# Altium PCB PCB-Support-STM32F407.PcbDoc (part 2 of 3)
Units mm, origin at the board's own origin, x right, y up, seen from the top; angles counter-clockwise.
Board outline 200 x 110 mm, 4 copper layers (Top Layer, Int1 (GND), Int2 (PWR), Bottom Layer), stack 1.369 mm thick; 116 components, 132 nets, 504 pads, 919 vias.
Unrouted connection lines stored in the file: 2.
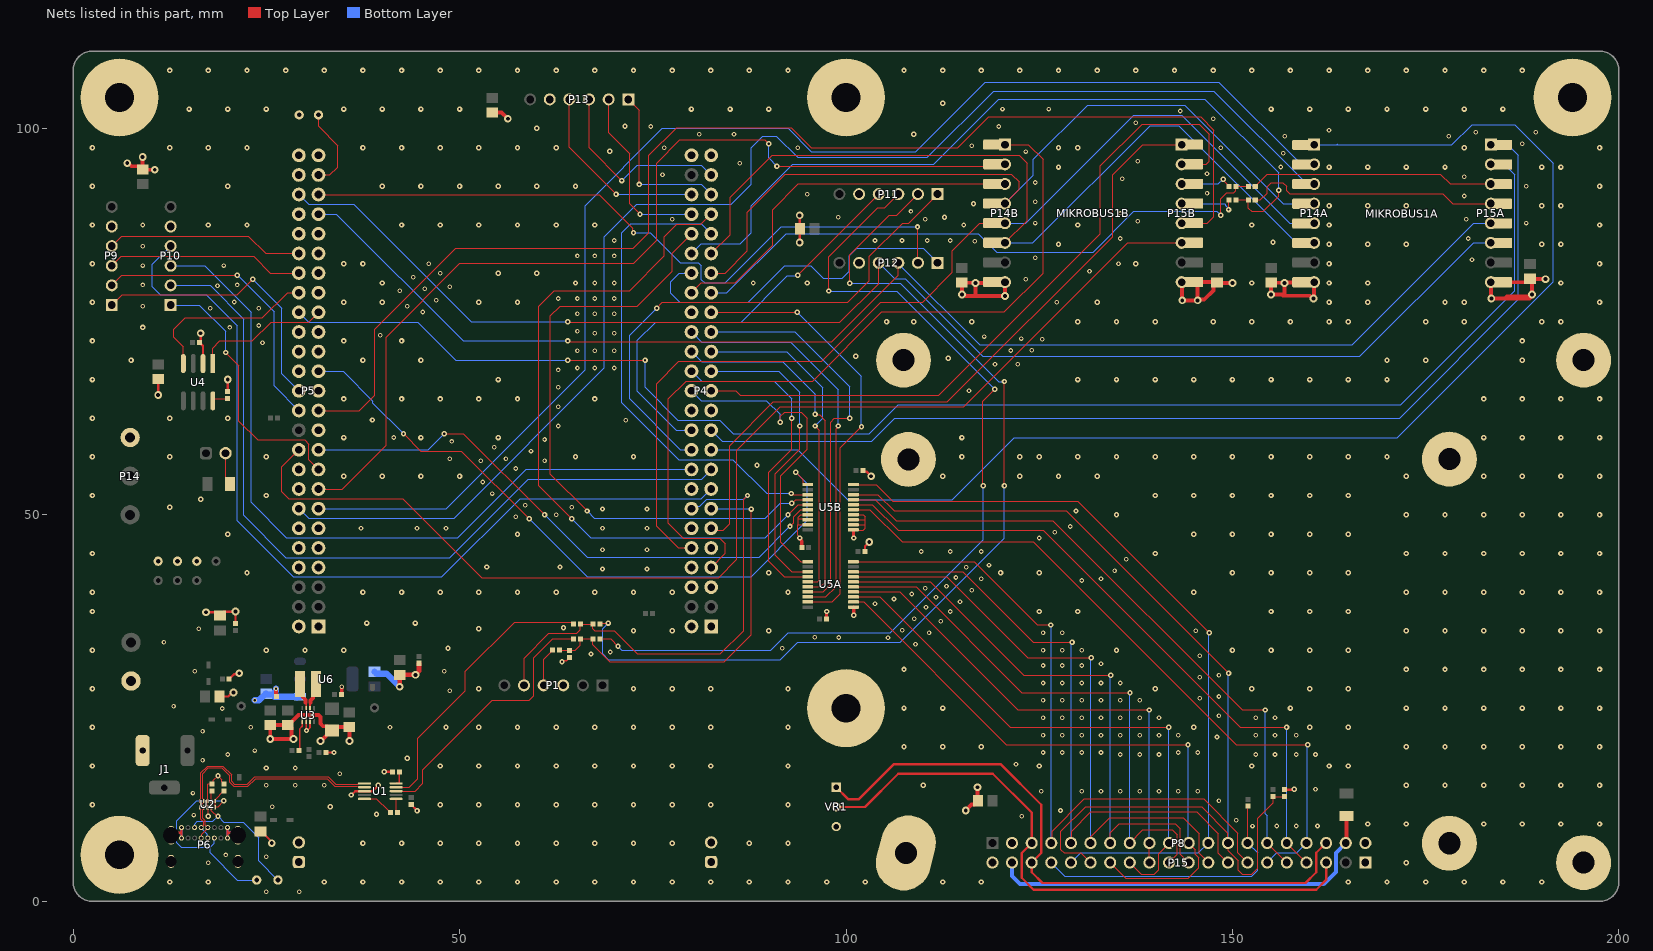
[diagram p4: the nets of this part, all layers, seen from the top]

## Via types
v1: diameter 0.7, hole 0.3, Top Layer to Bottom Layer, tented both sides, 532 vias
v2: diameter 0.6, hole 0.3, Top Layer to Bottom Layer, tented both sides, 298 vias
v3: diameter 1, hole 0.5, Top Layer to Bottom Layer, tented both sides, 89 vias

## Nets (pads, with @x,y where several pads share a name; then routed paths per layer and width w, separated by ;. In a path a pad name is that pad's centre, name@x,y a point inside that pad or via, vN(x,y) a via of type N, cw(c..) or ccw(c..) an arc to the next point about the centre after c; other vN are vias at no path point) (continued)
GND: C1.1 C2.1 C3.1 C4.1 C5.1 C6.1 C7.1 C8.1 C9.1 C10.1 C11.1 C12.1 C13.1 C14.1 C15.1 C16A.1 C16B.1 C17A.1 C17B.1 C18.1 C19.1 C20.1 C21.1 C22.1 C23A.1 C23B.1 C24A.1 C24B.1 C25.1 C26.1 C27.1 GND1.1 GND2.1 GND3.1 GND4.1 J1.2 MH1.1 MH2.1 MH3.1 MH4.1 MH5.1 MH6.1 MH7.1 MH8.1 MH9.1 MH10.1 MH11.1 MIKROBUS1A.8 MIKROBUS1A.9 MIKROBUS1B.8 MIKROBUS1B.9 P1.3 P2.1 P2.2 P3.1 P3.2 P4.1 P4.2 P4.5 P4.23 P4.49 P4.50 P5.1 P5.2 P5.49 P5.50 P6.1 P6.2 P6.3 P6.4 P6.A1 P6.A12 P6.B1 P6.B12 P7.1 P8.2 P8.20 P9.5 P10.5 P11.5 P12.5 P13.5 P14.3 P14A.8 P14B.8 P15.1 P15.20 P15A.8 P15B.8 pad.pt20 R9.1 R13.1 R14.1 R16.1 R19.1 R24.1 U1.3 U2.3 U2.8 U3.6 U3.7 U4.2 U5A.11 U5B.7 U5B.8 U5B.9 U5B.11 U5B.12 U5B.13 U5B.14 U6.1 VR1.3 | length 201.3
  Top Layer w0.15: v1(17.5,11) 17.453,11.047 17.453,12.1 U2.3@17.405,12.148 U2.8@17.405,12.983 17.405,15.112 17.493,15.2 R13.1@18,15.2 18.162,15.362 18.162,15.662 v1(18.75,16.25) 19.25,15.75 19.25,15.45 R14.1@19.5,15.2 ; 93.775,48.725 93.837,48.725 ; 93.775,48.739 93.775,47.363 94,47.138 v1(94,47) ; U5B.9@95.05,48.725 93.837,48.725 ; U5B.8@95.05,49.375 94.962,49.463 93.837,49.463 ; U5B.7@95.05,50.025 94.173,50.025 93.837,49.689 93.837,49.463 ; U5B.11@100.95,48.075 101.025,48 102.25,48 102.5,48.25 102.5,48.75 ; U5B.12@100.95,48.725 102.475,48.725 102.5,48.75 ; U5B.13@100.95,49.375 102.5,49.375 ; U5B.14@100.95,50.025 102.225,50.025 102.5,49.75 102.5,49.375 ; 93.837,48.725 93.837,49.463 ; 102.5,48.75 102.5,49.375
  Top Layer w0.2: 30,24.103 30.15,23.953 U3.6@30.15,23.3 30.15,22.15 v2(30.2,22.1) ; v2@30.2,22.077 v2(30.2,22.1) ; 30.457,24.103 30.65,23.91 U3.7@30.65,23.3 30.65,22.434 30.534,22.318 30.526,22.318 30.308,22.1 v2(30.2,22.1) ; v1(63.25,31) 63.346,31.096 63.796,31.096 R9.1@64.25,31.55
  Top Layer w0.3: v3(11,65.5) C21.1@11,67.55 ; P6.1@12.675,8.545 12.675,8.573 12.952,8.85 14.025,8.85 ; P6.B12@14.025,8.175 14.025,8.85 ; P6.A1@14.025,9.525 14.025,8.85 ; v3(16.5,73.5) 16.5,72.47 C22.1@16.34,72.31 16.805,71.845 U4.2@16.805,69.58 ; v3(17.199,37.402) 18.548,37.402 C14.1@19,36.95 19.5,37.45 20.95,37.45 v3(21,37.5) C15.1@21,35.95 ; C12.1@18.95,26.5 20.061,26.5 20.561,27 v3(20.75,27) ; P6.B1@19.975,8.175 19.975,8.85 ; P6.A12@19.975,9.525 19.975,8.85 ; R19.1@20,65.95 v3(20,67.5) ; C13.1@20.2,28.75 20.816,29.366 21.366,29.366 v3(21.5,29.5) ; P6.2@21.325,8.545 21.325,8.573 21.048,8.85 19.975,8.85 ; C1.1@24.25,9.05 24.35,9.05 25.7,7.7 v3(25.7,7.523) ; R16.1@32.7,19.25 v2(33.75,19.25) ; v1(36,13.75) 36.5,14.25 U1.3@37.7,14.25 38.75,14.25 v1(39.5,15) ; v1(40.25,16.75) C2.1@41.3,16.75 ; C3.1@43.75,12.5 44.5,11.75 v1(44.5,11.7) ; v3(94,85.25) 94,86.95 C19.1@94.05,87 94,87.05 v3(94,88.75) ; C24B.1@102.2,55.75 102.349,55.601 102.649,55.601 v3(103.25,55) ; C24A.1@102.45,45.25 102.45,45.95 v3(103,46.5) ; R24.1@156.75,14.45 157.95,14.45 v1(158,14.5)
  Top Layer w0.4: v1(94,47) 94,46.919 94.277,46.642 C23B.1@94.277,45.79 ; C23A.1@97.45,36.5 97.5,36.55 v1(97.5,37.5) ; U5A.11@100.95,38.075 100.975,38.075 101,38.05 v1(101,37) ; U5B.11@100.95,48.075 100.95,47.05 v1(101,47)
  Top Layer w0.5: v3(7,95.5) 7.135,95.5 7.535,95.1 8.525,95.1 8.967,94.658 v3(10.567,94.658) ; C18.1@9,94.7 v3(9,96.3) ; v2(26.25,27.5) 26.269,27.481 26.269,26.531 C11.1@26.3,26.5 ; v3(32,20.75) 32.05,20.75 33.4,22.1 C4.1@33.5,22.1 ; C6.1@34.75,26.75 v2(34.75,27.75) ; v3(35.75,20.75) C5.1@35.75,22.55 33.95,22.55 C4.1@33.5,22.1 ; C20.1@54.25,102.05 55.45,102.05 v3(56.25,101.25) ; v3(115.5,11.75) 116.25,12.5 116.65,12.5 117.05,12.9 C25.1@117.05,13 117,13.05 v3(117,14.75) ; MIKROBUS1B.9@144.86,80.11 P15B.8@143.43,80.11 143.465,80.075 143.465,77.785 v3(143.5,77.75) v3(145.5,77.75) ; MIKROBUS1B.9@144.86,80.123 C17B.1@148.373,80.123 ; MIKROBUS1B.9@145.5,80.11 v3(145.5,77.75) ; C17B.1@148,80.05 148.05,80 v3(150,80) ; C17B.1@148.018,80.123 147.545,79.65 147.545,79.045 146.346,77.846 145.596,77.846 v3(145.5,77.75) ; C16A.1@155,80.05 v3(155,78.5) 156.393,78.5 156.54,78.354 160.011,78.354 160.365,78 v3(160.5,78) 160.535,78.035 160.535,80.075 P14A.8@160.57,80.11 159.106,80.11 159.041,80.046 156.796,80.046 v3(156.75,80) ; C16A.1@155.11,80 155.135,80.025 156.725,80.025 v3(156.75,80) ; 156.75,78.354 v3(156.75,80) ; v3@188.605,78.148 188.457,78 187,78 ; 188.75,79.9 v3(188.75,78.5) 188.501,78.251 187.251,78.251 ; v3(190.5,80.5) 188.55,80.5 C17A.1@188.5,80.55 188.854,80.196 188.808,80.15 188,80.15 187.942,80.092 MIKROBUS1A.9@184.847,80.092 184.829,80.11 P15A.8@183.43,80.11 183.465,80.075 183.465,78.035 v3(183.5,78) 185.25,78 ; C10.1@27.85,22.8 29.153,24.103 30,24.103 30.457,24.103 31.761,24.103 32,23.864 32,23 32.35,22.65 32.95,22.65 C4.1@33.5,22.1 ; C10.1@27.85,22.8 28.25,22.4 28.25,21.385 28.5,21.135 v3(28.5,21) v3(25.5,21) C9.1@25.5,22.8 C10.1@27.75,22.8 C10.1@27.85,22.8 ; v3(116.75,80) 118.977,80 MIKROBUS1B.8@119.1,80.123 120.557,80.123 P14B.8@120.57,80.11 v3(120.57,78.32) 116.93,78.32 ; v3(116.75,80) 116.725,80.025 115.025,80.025 C16B.1@115,80.05 v3(115,78.5) 115.096,78.404 115.449,78.404 115.534,78.32 116.93,78.32 ; v3(116.75,80) 116.75,78.5 116.93,78.32 ; 185.25,78 187,78 ; 185.25,78 185.501,78.251 187.251,78.251 ; 187,78 187.251,78.251
  Top Layer w0.6: v3(42.25,27.75) C7.1@42.25,29.3 v3(44.3,29.3) 44.75,29.75 C8.1@44.75,30.8
  Bottom Layer w0.3: P6.B12@14.025,8.175 P6.A1@14.025,9.525 ; P6.B1@19.975,8.175 19.975,8.85 ; P6.A12@19.975,9.525 19.975,8.85 ; P6.2@21.325,8.545 21.325,8.573 21.048,8.85 19.975,8.85
  Bottom Layer w0.8: v2(23.5,26) 24.05,26 24.9,26.85 C26.1@25,26.85 25.1,26.75 25.781,26.75 ; v2(26.25,27.5) 26.25,27.219 25.781,26.75 ; U6.1@28.953,26.384 U6.1@29.029,26.46 ; U6.1@29.355,26.46 U6.1@29.029,26.46 ; C27.1@39,29.7 39.25,29.45 40.55,29.45 v3(42.25,27.75) ; 25.781,26.75 26.071,26.46 U6.1@29.029,26.46
  other v1: 12.5,2.5 17.5,2.5 32.5,2.5 37.5,2.5 42.5,2.5 47.5,2.5 52.5,2.5 57.5,2.5 62.5,2.5 67.5,2.5 72.5,2.5 77.5,2.5 82.5,2.5 87.5,2.5 92.5,2.5 97.5,2.5 102.5,2.5 112.5,2.5 117.5,2.5 165,2.5 170,2.5 175,2.5 180,2.5 185,2.5 190,2.5 172.5,5 37.5,7.5 42.5,7.5 47.5,7.5 52.5,7.5 57.5,7.5 62.5,7.5 67.5,7.5 72.5,7.5 77.5,7.5 87.5,7.5 92.5,7.5 167.5,10 172.5,10 182.5,10 187.5,10 192.5,10 197.5,10 39.25,11.25 33.25,12.25 2.5,12.5 47.5,12.5 52.5,12.5 57.5,12.5 62.5,12.5 67.5,12.5 72.5,12.5 77.5,12.5 82.5,12.5 92.5,12.5 110,15 172.5,15 177.5,15 182.5,15 187.5,15 192.5,15 197.5,15 25,17.25 2.5,17.5 47.5,17.5 52.5,17.5 57.5,17.5 62.5,17.5 67.5,17.5 72.5,17.5 77.5,17.5 82.5,17.5 92.5,17.5 125,17.5 152.5,17.5 162.5,17.5 165,17.5 43.25,18.5 107.5,20 112.5,20 117.5,20 172.5,20 177.5,20 182.5,20 187.5,20 192.5,20 197.5,20 2.5,22.5 48.25,22.5 52.5,22.5 57.5,22.5 62.5,22.5 67.5,22.5 72.5,22.5 77.5,22.5 82.5,22.5 92.5,22.5 145,22.5 160,22.5 165,22.5 107.5,25 112.5,25 157.5,25 172.5,25 177.5,25 182.5,25 187.5,25 192.5,25 197.5,25 2.5,27.5 52.5,27.5 72.5,27.5 77.5,27.5 82.5,27.5 92.5,27.5 140,27.5 152.5,27.5 160,27.5 165,27.5 107.5,30 172.5,30 177.5,30 182.5,30 187.5,30 192.5,30 197.5,30 2.5,32.5 25,32.5 30,32.5 35,32.5 135,32.5 150,32.5 155,32.5 160,32.5 165,32.5 48.5,32.75 72.5,35 77.5,35 90,35 172.5,35 177.5,35 182.5,35 187.5,35 192.5,35 197.5,35 52.5,35.25 63.446,35.382 38,36 44.25,36 2.5,37.5 125,37.5 130,37.5 155,37.5 160,37.5 165,37.5 2.5,40 37.5,40 42.5,40 47.5,40 52.5,40 57.5,40 62.5,40 67.5,40 72.5,40 77.5,40 92.5,40 145,40 172.5,40 177.5,40 182.5,40 187.5,40 192.5,40 197.5,40 22.5,42.5 90,42.5 120,42.5 125,42.5 150,42.5 155,42.5 160,42.5 165,42.5 53.5,43.25 63,43.25 2.5,45 140,45 172.5,45 177.5,45 182.5,45 187.5,45 192.5,45 197.5,45 20,47.5 57.5,47.5 145,47.5 150,47.5 155,47.5 160,47.5 165,47.5 135,50 172.5,50 177.5,50 182.5,50 187.5,50 192.5,50 197.5,50 12.5,51 16.5,52 2.5,52.5 25,52.5 140,52.5 145,52.5 150,52.5 155,52.5 160,52.5 165,52.5 35,55 40,55 45,55 50,55 112.5,55 122.5,55 127.5,55 132.5,55 172.5,55 182.5,55 187.5,55 192.5,55 197.5,55 88.49,56.428 2.5,57.5 12.5,57.5 25,57.5 65,57.5 72.5,57.5 115,57.5 122.5,57.5 125,57.5 130,57.5 135,57.5 140,57.5 145,57.5 150,57.5 155,57.5 160,57.5 165,57.5 170,57.5 35,60 45,60 55,60 115,60 182.5,60 187.5,60 192.5,60 197.5,60 38.727,62.271 2.5,62.5 12.5,62.5 20,62.5 35,65 42.5,65 47.5,65 52.5,65 57.5,65 67.5,65 182.5,65 187.5,65 192.5,65 197.5,65 2.5,67.5 55,67.5 130,67.5 135,67.5 140,67.5 145,67.5 150,67.5 155,67.5 160,67.5 165,67.5 170,67.5 7.5,70 37.5,70 45,70 170,70 175,70 187.5,70 113.25,70.25 101.25,70.5 2.5,72.5 35,72.5 42.5,72.5 187.5,72.5 9,74.25 105.25,75 108.75,75 116.25,75 130,75 135,75 140,75 147.5,75 152.5,75 157.5,75 162.5,75 165,75 175,75 180,75 190,75 192.5,75 2.5,77.5 35,77.5 40,77.5 52.5,77.5 57.5,77.5 132.5,77.5 162.5,77.5 167.5,77.5 177.5,77.5 180,77.5 197.5,77.5 40,80 65,80 95,80 152.5,80 162.5,80 167.5,80 192.5,80 55,81.25 60,81.25 2.5,82.5 35,82.5 37.5,82.5 137.5,82.5 162.5,82.5 197.5,82.5 127.5,85 162.5,85 167.5,85 172.5,85 190,85 192.5,85 155.25,85.25 2.5,87.5 17.5,87.5 22.5,87.5 42.5,87.5 47.5,87.5 52.5,87.5 57.5,87.5 62.5,87.5 67.5,87.5 130,87.5 152.5,87.5 162.5,87.5 197.5,87.5 112.75,88.5 162.5,90 167.5,90 172.5,90 190,90 192.5,90 116.5,90.25 2.5,92.5 20,92.5 40,92.5 45,92.5 50,92.5 55,92.5 60,92.5 65,92.5 197.5,92.5 127.5,95 162.5,95 167.5,95 172.5,95 177.5,95 190,95 192.5,95 69.421,97.024 2.5,97.5 12.5,97.5 17.5,97.5 22.5,97.5 37.5,97.5 42.5,97.5 47.5,97.5 52.5,97.5 57.5,97.5 62.5,97.5 127.5,97.5 130,97.5 180,97.5 197.5,97.5 108.75,99.25 60,100 71.409,100.296 15,102.5 20,102.5 25,102.5 35,102.5 40,102.5 45,102.5 50,102.5 80,102.5 85,102.5 90,102.5 155,102.5 160,102.5 165,102.5 170,102.5 175,102.5 180,102.5 185,102.5 112.5,103.25 12.5,107.5 17.5,107.5 22.5,107.5 27.5,107.5 32.5,107.5 37.5,107.5 42.5,107.5 47.5,107.5 52.5,107.5 57.5,107.5 62.5,107.5 67.5,107.5 72.5,107.5 77.5,107.5 82.5,107.5 87.5,107.5 92.5,107.5 107.5,107.5 112.5,107.5 117.5,107.5 122.5,107.5 127.5,107.5 132.5,107.5 137.5,107.5 142.5,107.5 147.5,107.5 152.5,107.5 157.5,107.5 162.5,107.5 167.5,107.5 172.5,107.5 177.5,107.5 182.5,107.5 187.5,107.5
  other v2: 25,1.25 29.25,1.25 17.5,5 25,5.75 19.75,6 152.603,9.732 155.75,9.75 158.25,9.75 161,9.75 150.5,10.5 122.75,11 15.612,11.154 127.75,11.75 25.75,12.25 148.25,13 15.5,14 125.25,14.25 130.5,14.25 133,14.25 135.5,14.25 138,14.25 140.5,14.25 143,14.25 145.5,14.25 160.75,14.5 25,15 28.75,15 32.5,15 34.5,16.5 28.75,17.25 122,17.75 16.75,18.25 20,19 135.5,19 138,19 140.5,19 153,19 155.5,19 158.25,19 160.75,19 125.5,19.25 128,19.25 130.5,19.25 133,19.25 143,19.25 145.5,19.25 23.5,19.5 148,21.25 125.5,21.5 128,21.5 130.5,21.5 133,21.5 135.5,21.5 138,21.5 140.5,21.5 143,21.5 153,21.5 155.5,21.5 158.25,21.5 16.75,22 23,22.5 41,22.5 125.5,23.75 128,23.75 130.5,23.75 133,23.75 135.5,23.75 138,23.75 140.5,23.75 153,23.75 155.5,23.75 148.25,24 19.297,24.947 13,25.25 125.5,26 128,26 130.5,26 133,26 135.5,26 138,26 145.75,26.25 148.25,26.5 48.75,27.25 125.5,28.25 128,28.25 130.5,28.25 133,28.25 135.5,28.25 145.75,29 148.25,29.25 15.75,29.75 48,29.75 125.5,30.5 128,30.5 130.5,30.5 133,30.75 145.75,31.75 67,32 69.5,32.25 125.5,32.5 128,32.5 130.5,32.5 91.75,32.75 109,33.25 11.75,33.5 99.068,34.125 105.443,34.107 95.963,34.153 110.75,34.75 125.5,34.75 128,34.75 145.25,35 107.276,35.065 16.25,35.25 112.25,36.25 108.814,36.566 113.5,37.5 110.353,38.031 103.75,38.5 114.75,38.75 106.218,39.108 111.642,39.358 108.5,39.75 116.25,40.25 110.25,40.5 113,40.75 130.5,41.5 117.5,41.75 133,41.75 114.222,41.891 134.75,42.75 68.5,43 74.25,43 115.567,43.208 118.5,43.5 136.25,44.25 109.75,45.25 113.5,45.25 117.5,45.25 68.5,45.5 74.25,45.5 125,47 127,47.75 37.25,48.25 44.5,48.25 48.25,48.25 68.5,48.25 74.25,48.25 129,48.5 57.25,49.75 62.5,50 129.75,50.5 68.5,50.75 74.25,50.75 64.5,51 58.5,51.25 54.25,52.75 53,54.25 57.25,56 52.75,57 61,57 48.75,57.25 56,57.25 59.25,58.25 54.5,58.75 49,59.5 61,59.75 41.5,60 62.75,61.5 71.5,62.25 62.75,64 115.915,66.07 62.75,66.5 62.75,68.75 65.25,69 67.5,69 70,69 119.283,69.473 122.237,69.472 65.25,71.25 67.5,71.25 70,71.25 121.301,71.268 124.047,71.28 24.5,72.25 125.408,72.735 122.686,72.806 117.875,73.064 39.75,73.25 67.5,73.5 70,73.5 65.25,73.75 20.25,74.25 24,74.5 65.25,76 67.5,76 70,76 45.25,76.25 17.75,76.75 24,76.75 9,77 43.25,77 127.25,77.5 20.837,77.537 47,77.75 62.75,78 65.25,78 67.5,78 70,78 42.25,79 45.5,79.25 48.75,79.5 18.68,79.64 9,79.75 21.25,79.75 67.5,80 70,80 88,80 123.25,80.5 44,80.75 47.5,81.25 131.5,81.5 9,82.25 19.5,82.25 46,82.5 135.25,82.5 181,83 124.5,83.25 65.25,83.5 67.5,83.5 70,83.5 9,84.75 116.656,85.403 70,85.5 103.75,85.5 107.25,85.5 110.5,85.5 113.5,85.5 135.5,85.75 180.5,85.75 9,87.5 115.25,87.5 124.5,87.75 188,87.75 137.75,88 77.5,88.25 110.25,88.25 180.25,88.25 99,88.5 135.5,89 108.401,89.258 124.5,90.5 180,91.25 95,91.5 146.718,91.6 188,92.5 124.5,93 135.75,93.5 180,93.75 76.25,94 146.708,94.146 156.25,95 86.25,95.5 137.75,95.75 156.557,96.782 123.25,97 76.5,97.5 93.75,97.5 148.5,97.5 116.25,97.75 187.5,98 156.75,99 178,99 81,99.25 85.5,99.25 181.5,99.5 189.25,99.5 162.5,99.75 74.75,100.25 119.75,100.25 137.501,100.747 147.5,101.25 143.25,102.25 120.25,102.5 126.25,102.5
MB1-RX: MIKROBUS1A.14 P15A.3 R3.1 | length 31.7
  Top Layer w0.15: R3.1@152.936,92.536 152.986,92.536 153.2,92.75 153.2,92.8 154.488,94.088 176.912,94.088 178.19,92.81 P15A.3@183.43,92.81
MB1-TX: MIKROBUS1A.13 P15A.4 R4.1 | length 33.4
  Top Layer w0.15: R4.1@152.95,90.75 153.628,90.75 154.474,91.596 154.474,92.474 155,93 156.5,93 157,92.5 157,91.948 157.395,91.553 177.205,91.553 178.488,90.27 P15A.4@183.43,90.27
MB2-RX: MIKROBUS1B.14 P15B.3 R1.1 | length 6.9
  Top Layer w0.15: v1(148.811,93.433) 148.916,93.327 148.916,93.134 149.3,92.75 R1.1@149.55,92.5
  Bottom Layer w0.15: P15B.3@143.43,92.81 148.161,92.81 148.784,93.433 v1(148.811,93.433)
MB2-TX: MIKROBUS1B.13 P15B.4 R2.1 | length 7.8
  Top Layer w0.15: v1(149.5,89.5) 149.5,90.7 R2.1@149.55,90.75
  Bottom Layer w0.15: P15B.4@143.43,90.27 148.98,90.27 149.165,90.085 149.165,89.979 149.5,89.644 v1(149.5,89.5)
NetC2_2: C2.2 U1.10 | length 1.9
  Top Layer w0.2: U1.10@41.8,15.25 42.2,15.25 C2.2@42.2,16.75
NetCC1_1: CC1.1 P6.A5 R13.2 U2.4 U2.7 | length 20.6
  Top Layer w0.15: R13.2@18,14.3 17.905,14.205 U2.7@17.905,12.983 17.905,11.718 18.623,11 v1(18.75,11)
  Bottom Layer w0.15: P6.A5@15.725,9.525 15.725,9.999 16.066,10.34 18.09,10.34 v1(18.75,11) 19.516,10.234 22.016,10.234 24,8.25 24,5.25 CC1.1@26.5,2.75
NetCC2_1: CC2.1 P6.B5 R14.2 U2.5 U2.6 | length 28.2
  Top Layer w0.15: U2.5@18.405,12.148 U2.5@18.405,12.225 ; v1(19.5,13) 18.75,12.25 18.43,12.25 U2.5@18.405,12.225 ; R14.2@19.5,14.3 18.43,13.23 18.43,13.008 U2.6@18.405,12.983 U2.5@18.405,12.225
  Bottom Layer w0.15: P6.B5@18.275,8.175 18.275,7.525 17.75,7 ; v1(19.5,13) 16,13 13.401,10.4 13.401,7.599 14,7 17.75,7 ; CC2.1@23.75,2.75 21.25,2.75 17.75,6.25 17.75,7
NetJ2_2: J2.2 R20.2 | length 4.2
  Top Layer w0.125: J2.2@19.725,57.975 19.725,54.525 R20.2@20.275,53.975
NetL1_1: L1.1 U3.3 | length 3.5
  Top Layer w0.2: 30.079,25.724 30.15,25.652 U3.3@30.15,24.9 U3.3@30.142,24.908
  Top Layer w0.5: L1.1@29.35,28.1 29.75,27.7 29.75,26.406 30.079,26.078 30.079,25.724
NetL1_2: L1.2 U3.2 | length 3.5
  Top Layer w0.2: U3.2@30.65,24.9 30.65,25.659 30.729,25.738
  Top Layer w0.5: 30.729,25.738 30.729,25.979 31.05,26.3 31.05,27.7 L1.2@31.45,28.1
NetP1_4: P1.4 R7.2 | length 5
  Top Layer w0.15: P1.4@60.88,27.94 60.88,31.33 R7.2@62.05,32.5
NetP4_6: P4.6
NetP4_8: P4.8
NetP4_9: P4.9
NetP4_12: P4.12
NetP4_16: P4.16
NetP4_24: P4.24
NetP4_34: P4.34
NetP5_7: P5.7
NetP5_8: P5.8
NetP5_9: P5.9
NetP5_10: P5.10
NetP5_11: P5.11
NetP5_12: P5.12
NetP5_16: P5.16
NetP5_18: P5.18
NetP5_21: P5.21
NetP5_25: P5.25
NetP5_28: P5.28
NetP5_29: P5.29
NetP5_30: P5.30
NetP5_31: P5.31
NetP5_32: P5.32
NetP5_35: P5.35
NetP5_37: P5.37
NetP5_39: P5.39
NetP5_41: P5.41
NetP5_42: P5.42
NetP5_44: P5.44
NetP5_48: P5.48
NetP8_3: P8.3 P15.3 VR1.2 | length 80.9
  Top Layer w0.3: VR1.2@98.75,12.21 102.46,12.21 106.75,16.5 119,16.5 124.021,11.479 P8.3@124.021,7.539 122.734,6.252 122.734,3.04 124.274,1.5 160.857,1.5 162.121,2.764 P15.3@162.121,5.009
NetP8_4: P8.4 P15.7 U5A.20 | length 90.7
  Top Layer w0.15: U5A.20@100.95,43.925 116.575,43.925 124.75,35.75 v1(126.5,35.75) ; P8.4@126.561,7.539 126.691,7.669 126.691,9.084 130.857,13.25 146.274,13.25 150.691,8.834 150.691,6.279 P15.7@151.961,5.009
  Bottom Layer w0.15: v1(126.5,35.75) 126.53,35.72 126.53,7.569 P8.4@126.561,7.539
NetP8_5: P8.5 P15.8 U5A.18 | length 85.1
  Top Layer w0.15: U5A.18@100.95,42.625 115.125,42.625 124.25,33.5 v1(129.25,33.5) ; P8.5@129.101,7.539 129.191,7.629 129.191,9.084 131.691,11.584 145.354,11.584 148.191,8.747 148.191,6.239 P15.8@149.421,5.009
  Bottom Layer w0.15: P8.5@129.101,7.539 129.175,7.613 129.175,33.425 v1(129.25,33.5)
NetP8_6: P8.6 P15.9 U5A.17 | length 80
  Top Layer w0.15: U5A.17@100.95,41.975 113.025,41.975 123.5,31.5 v1(131.75,31.5) ; P8.6@131.641,7.539 131.691,7.589 131.691,8.334 134.154,10.797 143.613,10.797 145.691,8.719 145.691,6.199 P15.9@146.881,5.009
  Bottom Layer w0.15: P8.6@131.641,7.539 131.695,7.593 131.695,31.445 v1(131.75,31.5)
NetP8_7: P8.7 P15.10 U5A.16 | length 76.1
  Top Layer w0.15: U5A.16@100.95,41.325 110.92,41.325 122.995,29.25 v1(134.25,29.25) ; P8.7@134.181,7.539 134.181,8.874 135.371,10.064 142.576,10.064 143.269,9.371 143.269,6.08 P15.10@144.341,5.009
  Bottom Layer w0.15: P8.7@134.181,7.539 134.215,7.573 134.215,29.215 v1(134.25,29.25)
NetP8_8: P8.8 P15.11 U5A.15 | length 72.1
  Top Layer w0.15: U5A.15@100.95,40.675 109.07,40.675 122.745,27 v1(136.75,27) ; P8.8@136.721,7.539 138.412,9.23 142.218,9.23 142.868,8.58 142.868,6.077 P15.11@141.801,5.009
  Bottom Layer w0.15: P8.8@136.721,7.539 136.735,7.553 136.735,26.985 v1(136.75,27)
NetP8_9: P8.9 P15.12 U5A.14 | length 64.4
  Top Layer w0.15: U5A.14@100.95,40.025 106.975,40.025 122.25,24.75 v1(139.25,24.75) ; P15.12@139.261,5.009 P8.9@139.261,7.539
  Bottom Layer w0.15: v1(139.25,24.75) 139.255,24.745 139.255,7.544 P8.9@139.261,7.539
NetP8_10: P8.10 P15.13 U5A.13 | length 71.4
  Top Layer w0.15: U5A.13@100.95,39.375 104.375,39.375 121.25,22.5 v1(141.75,22.5) ; P15.13@136.721,5.009 138.217,3.512 139.869,3.512 140.441,4.084 140.441,6.179 P8.10@141.801,7.539
  Bottom Layer w0.15: v1(141.75,22.5) 141.775,22.475 141.775,7.564 P8.10@141.801,7.539
NetP8_11: P8.11 P15.14 U5A.12 | length 80.3
  Top Layer w0.15: U5A.12@100.95,38.725 102.275,38.725 120.75,20.25 v1(144.25,20.25) ; P15.14@134.181,5.009 136.195,2.994 144.297,2.994 145.628,4.326 145.628,5.646 145.191,6.084 145.191,6.689 P8.11@144.341,7.539
  Bottom Layer w0.15: v1(144.25,20.25) 144.295,20.205 144.295,7.584 P8.11@144.341,7.539
NetP8_12: P8.12 P15.16 U5B.20 | length 100.1
  Top Layer w0.15: U5B.20@100.95,53.925 103.886,53.925 106.061,51.75 130,51.75 v1(147,34.75)
  Bottom Layer w0.15: P15.16@129.101,5.009 130.342,6.25 145.592,6.25 146.94,7.598 146.94,34.69 v1(147,34.75)
NetP8_13: P8.13 P15.15 R23.1 R24.2 U5B.18 | length 131.5
  Top Layer w0.15: U5B.18@100.95,52.625 104.125,52.625 106.25,50.5 128.5,50.5 v1(149.5,29.5) ; P15.15@131.641,5.009 130.399,6.25 128.25,6.25 127.803,6.697 127.803,9.053 131,12.25 146,12.25 149.421,8.829 P8.13@149.421,7.539 149.471,7.488 149.471,6.529 150.75,5.25 150.75,4 151.25,3.5 152.5,3.5 153.25,4.25 153.25,10.75 155.25,12.75 R23.1@155.25,13.55 ; R23.1@155.3,13.6 R23.1@155.25,13.55 ; R24.2@156.75,13.55 R23.1@155.25,13.55
  Bottom Layer w0.15: P8.13@149.421,7.539 149.46,7.578 149.46,29.46 v1(149.5,29.5)
NetP8_14: P8.14 P15.17 R21.1 | length 36.3
  Top Layer w0.15: P8.14@151.961,7.539 151.961,11.961 R21.1@152,12
  Bottom Layer w0.15: P15.17@126.561,5.009 128.319,3.25 152.5,3.25 153.25,4 153.25,6.249 P8.14@151.961,7.539
NetP8_15: P8.15 P15.5 U5B.17 | length 85.5
  Top Layer w0.15: U5B.17@100.95,51.975 103.775,51.975 106.5,49.25 126.75,49.25 151.25,24.75 v1(154.25,24.75) ; P8.15@154.501,7.539 154.506,7.539 157.036,5.009 P15.5@157.041,5.009
  Bottom Layer w0.15: v1(154.25,24.75) 154.25,11.304 154.5,11.054 P8.15@154.501,7.539
NetP8_16: P8.16 P15.4 U5B.16 | length 86.6
  Top Layer w0.15: U5B.16@100.95,51.325 103.425,51.325 106.75,48 125.5,48 151,22.5 v1(157,22.5) ; P8.16@157.041,7.539 157.046,7.539 159.576,5.009 P15.4@159.581,5.009
  Bottom Layer w0.15: v1(157,22.5) 157.02,22.48 157.02,7.559 P8.16@157.041,7.539
NetP8_17: P8.17 P15.6 U5B.15 | length 90.3
  Top Layer w0.15: U5B.15@100.95,50.675 103.075,50.675 107.25,46.5 124.25,46.5 150.5,20.25 v1(159.75,20.25)
  Bottom Layer w0.15: P15.6@154.501,5.009 155.742,6.25 158.292,6.25 159.665,7.623 159.665,20.165 v1(159.75,20.25)
NetP8_18: P8.18 P15.18 VR1.1 | length 82.7
  Top Layer w0.3: VR1.1@98.74,14.75 100.269,13.221 101.676,13.221 106.205,17.75 120,17.75 125.25,12.5 125.25,6.238 P15.18@124.021,5.009 124.021,3.754 125.411,2.364 159.471,2.364 160.851,3.744 160.851,6.269 P8.18@162.121,7.539
NetP8_19: P8.19 P15.19 R22.2 | length 52.5
  Top Layer w0.5: P8.19@164.661,7.539 164.75,7.628 R22.2@164.75,11.05
  Bottom Layer w0.5: P15.19@121.481,5.009 121.481,3.269 122.5,2.25 161.822,2.25 163.384,3.812 163.384,6.262 P8.19@164.661,7.539
NetR15_1: R15.1 U1.5 | length 4.3
  Top Layer w0.15: U1.5@37.7,13.25 39.252,13.25 40.753,11.75 40.8,11.75 R15.1@41.05,11.5 R15.1@41.05,11.24
NetR15_2: R15.2 U1.6 | length 1.8
  Top Layer w0.15: U1.6@41.8,13.25 41.8,11.65 R15.2@41.95,11.5
NetR18_1: R18.1 U3.5 | length 4
  Top Layer w0.2: R18.1@29.2,19.5 29.35,19.65 29.35,22.35 29.65,22.65 U3.5@29.65,23.3
NetR19_2: R19.2 U4.8 | length 2.1
  Top Layer w0.15: U4.8@18.075,64.752 18.075,64.832 18.293,65.05 R19.2@20,65.05
PA1/TIM-2/5: MIKROBUS1B.16 P4.11 P15B.1 | length 92.3
  Top Layer w0.15: P4.11@82.55,48.26 82.81,48 84.115,48 84.958,48.843 84.958,58.958 90.604,64.604 113.104,64.604 134.5,86 134.5,94 138.39,97.89 P15B.1@143.43,97.89
PA2/USART2-TX: P1.5 P4.14 R5.2 R8.2 | length 63
  Top Layer w0.15: P1.5@58.34,27.94 58.34,31.464 61.549,34.672 65.145,34.672 65.62,35.147 R8.2@65.62,35.865 R5.2@67.26,35.865 67.26,35.24 67.5,35 70,35 73,32 83.75,32 86.75,35 86.75,52 v1(87.25,52.5)
  Bottom Layer w0.15: P4.14@80.01,50.8 80.322,51.112 81.095,51.112 81.983,52 86.75,52 v1(87.25,52.5)
PA3/USART2-RX: P4.13 R6.2 R7.1 R9.2 R10.2 | length 50.5
  Top Layer w0.15: R7.1@62.95,32.5 64.974,32.5 65.62,33.146 R10.2@65.62,33.96 R6.2@67.26,33.96 67.26,33.205 69.465,31 84.25,31 87.75,34.5 v1(87.75,50.75)
  Bottom Layer w0.15: P4.13@82.55,50.8 82.575,50.775 87.725,50.775 v1(87.75,50.75)
PA5/SPI1-CLK: P4.15 P10.4 | length 113.6
  Bottom Layer w0.15: P10.4@12.62,84.77 10.25,82.4 10.25,79.5 11.301,78.449 17.207,78.449 21.218,74.437 21.218,49.236 28.496,41.959 47.709,41.959 57.825,52.075 81.285,52.075 P4.15@82.55,53.34
PA6/SPI1-MISO: P4.18 P10.3 | length 100.1
  Bottom Layer w0.15: P10.3@12.62,82.23 17.02,82.23 23.021,76.229 23.021,51.6 27.598,47.023 49.773,47.023 58.63,55.88 P4.18@80.01,55.88
PA7/SPI1-MOSI: P4.17 P10.2 | length 104.1
  Bottom Layer w0.15: P10.2@12.62,79.69 17.724,79.69 22.086,75.329 22.086,49.922 27.544,44.464 48.714,44.464 58.884,54.634 81.304,54.634 P4.17@82.55,55.88
PA8/I2C3-SCL: MIKROBUS1A.12 P5.43 P12.3 P15A.5 | length 174.6
  Top Layer w0.15: v1(64,72.5) 64.078,72.422 98.167,72.422 106.77,81.025 P12.3@106.77,82.61
  Bottom Layer w0.15: P5.43@31.75,88.9 34.068,88.9 50.468,72.5 v1(64,72.5) ; P12.3@106.77,82.61 106.77,82.516 117.286,72 165.5,72 181.23,87.73 P15A.5@183.43,87.73
PA15/D3: P5.40 P9.4 | length 25.7
  Top Layer w0.15: P9.4@5,84.77 6.299,86.069 22.654,86.069 24.903,83.82 P5.40@29.21,83.82
PB0/D1: P4.22 P11.4 | length 54.7
  Top Layer w0.15: v1(93.75,81) 93.75,81.02 P11.4@104.23,91.5
  Bottom Layer w0.15: P4.22@80.01,60.96 78.04,60.96 73,66 73,72.558 75.388,74.945 86.445,74.945 92.425,80.925 93.675,80.925 v1(93.75,81)
PB1/TIM-3/8: MIKROBUS1A.16 P4.21 P15A.1 | length 135.4
  Bottom Layer w0.15: P4.21@82.55,60.96 84.01,59.5 103.3,59.5 106.3,62.5 171.624,62.5 187,77.876 187,96.5 185.61,97.89 P15A.1@183.43,97.89
PB5/D0: P5.26 P9.1 | length 36.6
  Top Layer w0.15: P9.1@5,77.15 6.35,78.5 21.25,78.5 v1(23.25,80.5)
  Bottom Layer w0.15: v1(23.25,80.5) 27,76.75 27,68.25 P5.26@29.21,66.04
PB6/I2C1-SCL: MIKROBUS1B.12 P5.23 P15B.5 | length 161.6
  Top Layer w0.15: P5.23@31.75,63.5 37.044,63.5 39,65.456 39,74 49.5,84.5 72.5,84.5 74.5,86.5 74.5,96.5 78.102,100.102 92.898,100.102 95.532,97.468 114.468,97.468 118.5,101.5 145.878,101.5 147.585,99.793 147.585,88.568 146.746,87.73 144.86,87.73 P15B.5@143.43,87.73 MIKROBUS1B.12@143.802,88.102
PB7/D1: P5.24 P9.2 | length 37.6
  Top Layer w0.15: P9.2@5,79.69 6.31,81 v1(21.25,81)
  Bottom Layer w0.15: v1(21.25,81) 21.282,81 26,76.282 26,66.71 P5.24@29.21,63.5
PB8/CS0: P5.19 U5B.6 | length 73.8
  Top Layer w0.15: v1(48,60.5) 50.5,60.5 v1(61,50) ; v1(92.75,48.5) 93.227,48.977 93.227,49.727 94.175,50.675 U5B.6@95.05,50.675
  Bottom Layer w0.15: P5.19@31.75,58.42 45.92,58.42 v1(48,60.5) ; v1(61,50) 66.5,44.5 88.75,44.5 v1(92.75,48.5)
PB9/I2C1-SDA: MIKROBUS1B.11 P5.20 P15B.6 | length 153.6
  Top Layer w0.15: P5.20@29.21,58.42 27,56.21 27,53 27.897,52.103 42.647,52.103 52.893,41.857 83.509,41.857 85.883,44.231 85.883,58.341 91.499,63.957 115.207,63.957 136.44,85.19 P15B.6@143.43,85.19
PB11/UART3-RX: P4.35 R1.2 R3.2 | length 79.1
  Top Layer w0.15: v1(148.5,88.75) 148.5,90.918 149.266,91.684 150.184,91.684 150.45,91.95 R1.2@150.45,92.5 R3.2@152,92.5
  Bottom Layer w0.15: P4.35@82.55,78.74 84.599,78.74 92.252,86.393 117.107,86.393 119.5,84 132,84 137.25,89.25 148,89.25 v1(148.5,88.75)
PB12/CS: MIKROBUS1B.3 P4.36 P14B.3 | length 49.1
  Top Layer w0.15: P4.36@80.01,78.74 81.27,80 85.639,80 90.5,84.861 90.5,89.5 93.81,92.81 P14B.3@120.57,92.81
PB13/SPI2-SCK: MIKROBUS1A.4 MIKROBUS1B.4 P4.37 P14A.4 P14B.4 | length 103.8
  Top Layer w0.15: P4.37@82.55,81.28 84.377,81.28 87.246,84.149 87.246,89.181 92.124,94.058 121.41,94.058 122.396,93.071 122.396,92.096 P14B.4@120.57,90.27
  Bottom Layer w0.15: P14B.4@120.57,90.27 124.25,93.95 124.25,96 131.25,103 143.855,103 156.585,90.27 P14A.4@160.57,90.27
PB14/D2: P4.38 P12.1 | length 45.8
  Bottom Layer w0.15: P4.38@80.01,81.28 78.448,81.28 77.307,80.139 77.307,78.693 78.5,77.5 87.356,77.5 92.106,82.25 95.441,82.25 97.065,80.625 99.52,80.625 100.418,81.523 100.418,83.491 101.389,84.462 109.998,84.462 P12.1@111.85,82.61
PB15/SPI2-MOSI: MIKROBUS1A.6 MIKROBUS1B.6 P4.39 P14A.6 P14B.6 | length 113.5
  Top Layer w0.15: P4.39@82.55,83.82 85,86.27 85,91.061 90.489,96.549 122.385,96.549 123.457,95.477 123.457,88.077 P14B.6@120.57,85.19
  Bottom Layer w0.15: P14B.6@120.57,85.19 124.19,85.19 139.371,100.371 143.08,100.371 158.261,85.19 P14A.6@160.57,85.19
PC1/ADC123-IN11: MIKROBUS1B.1 P4.7 P14B.1 | length 104.1
  Top Layer w0.15: P4.7@82.55,43.18 84.407,45.037 84.407,46.238 83.676,46.968 78.965,46.968 77,48.934 77,65 79.302,67.302 95.675,67.302 104.628,76.255 120.505,76.255 125.5,81.25 125.5,96 123.61,97.89 P14B.1@120.57,97.89
PC2/SPI2-MISO: MIKROBUS1A.5 MIKROBUS1B.5 P4.10 P14A.5 P14B.5 | length 131
  Top Layer w0.15: P4.10@80.01,45.72 78.28,45.72 75.5,48.5 75.5,66.964 78.388,69.852 96.878,69.852 104.526,77.5 109.904,77.5 113.773,81.369 113.773,84.177 117.326,87.73 P14B.5@120.57,87.73
  Bottom Layer w0.15: P14B.5@120.57,87.73 123.287,87.73 137.248,101.691 143.462,101.691 157.424,87.73 P14A.5@160.57,87.73
PC4/D0: P4.20 P11.1 | length 68.3
  Top Layer w0.15: v1(75.5,76.75) 76.25,77.5 100.232,77.5 103,80.268 103,83.438 107.312,87.75 108.1,87.75 P11.1@111.85,91.5
  Bottom Layer w0.15: v1(75.5,76.75) 72,73.25 72,65 78.58,58.42 P4.20@80.01,58.42
PC5/ADC12-IN15: MIKROBUS1A.1 P4.19 P14A.1 | length 172.9
  Bottom Layer w0.15: P4.19@82.55,58.42 93.761,58.42 100.199,51.981 113.731,51.981 121.75,60 171.321,60 191.5,80.179 191.5,95.5 186.5,100.5 181,100.5 178.39,97.89 163.61,97.89 ; P14A.1@160.57,97.89 163.61,97.89 ; 163.5,98 163.61,97.89
PC6/UART6-TX/TIM-3: P5.47 TX6.1 | length 11.2
  Top Layer w0.15: P5.47@31.75,93.98 33.23,93.98 34.25,95 34.25,97.75 31.75,100.25 TX6.1@31.75,102.193
PC8/D3: P5.45 P12.2 | length 91.3
  Top Layer w0.15: P5.45@31.75,91.44 68.06,91.44 72.425,87.075 72.425,86.575 v1(72.5,86.5) ; v1(109.25,87.25) 109.28,87.22 109.28,82.64 P12.2@109.31,82.61
  Bottom Layer w0.15: v1(72.5,86.5) 74.649,86.5 78.55,82.599 80.901,82.599 81.273,82.227 81.273,80.437 81.71,80 84.359,80 91.648,87.289 109.211,87.289 v1(109.25,87.25)
PC9/I2C3-SDA: MIKROBUS1A.11 P5.46 P12.4 P15A.6 | length 176.9
  Top Layer w0.15: v1(64,75) 64.081,74.919 99.218,74.919 104.23,79.931 P12.4@104.23,82.61
  Bottom Layer w0.15: P5.46@29.21,91.44 30.468,90.182 36.318,90.182 51.5,75 v1(64,75) ; P12.4@104.23,82.61 106.305,80.535 107.668,80.535 117.703,70.5 166.5,70.5 181.19,85.19 P15A.6@183.43,85.19
PC11/D2: P5.38 P9.3 | length 25.6
  Top Layer w0.15: P9.3@5,82.23 6.215,83.445 23.358,83.445 25.523,81.28 P5.38@29.21,81.28
PD0/CAN-RX: P5.36 U4.4 | length 23.1
  Top Layer w0.15: U4.4@14.265,69.58 14.265,71.735 13,73 13,74 14.5,75.5 24.5,75.5 27.74,78.74 P5.36@29.21,78.74
PD1/CAN-TX: P5.33 U4.1 | length 17.6
  Top Layer w0.15: U4.1@18.075,69.58 18.075,71.575 19,72.5 23.208,72.5 25.615,74.906 30.456,74.906 P5.33@31.75,76.2
PD2/INT: MIKROBUS1A.15 P5.34 P15A.2 | length 192.1
  Top Layer w0.15: v1(64,70) v1(74,70)
  Bottom Layer w0.15: P5.34@29.21,76.2 30.515,74.895 44.605,74.895 49.5,70 v1(64,70) ; v1(74,70) 74,66.5 78.24,62.26 83.666,62.26 85.426,60.5 102.997,60.5 106.747,64.25 171.75,64.25 186.5,79 186.5,94 185.15,95.35 P15A.2@183.43,95.35
PD7/A0: P5.27 U5B.1 | length 86.7
  Top Layer w0.15: v1(42.75,60.5) 45,58.25 50.25,58.25 v1(59,49.5) ; v1(93.5,55.5) 94.474,54.526 94.474,54.075 94.624,53.925 U5B.1@95.05,53.925
  Bottom Layer w0.15: P5.27@31.75,68.58 34.92,68.58 38.782,64.718 38.782,64.468 v1(42.75,60.5) ; v1(59,49.5) 66.494,42.006 87.732,42.006 95,49.273 95,54 v1(93.5,55.5)
PD8/UART3-TX: P4.40 R2.2 R4.2 | length 100.9
  Top Layer w0.15: R2.2@150.45,90.75 R4.2@152.05,90.75 152.05,89.7 152.5,89.25 154,89.25 156,91.25 v1(156,92)
  Bottom Layer w0.15: P4.40@80.01,83.82 81.286,85.096 86.346,85.096 87.75,86.5 87.75,90 93.125,95.375 111.347,95.375 119.775,103.803 146.447,103.803 156,94.25 v1(156,92)
PD9/A1: P4.41 U5B.3 | length 63.5
  Top Layer w0.15: v1(92.905,52.767) 93.054,52.767 93.196,52.625 U5B.3@95.05,52.625
  Bottom Layer w0.15: P4.41@82.55,86.36 81.277,87.633 72.133,87.633 71,86.5 71,64.5 78.346,57.154 85.346,57.154 89.733,52.767 v1(92.905,52.767)
PD10/A2: P4.42 U5B.4 | length 81.2
  Top Layer w0.15: v1(66.5,50.5) 61.75,55.25 61.75,75.75 63,77 73,77 77.5,81.5 77.5,83.85 P4.42@80.01,86.36 ; v1(93,51.5) 93.475,51.975 U5B.4@95.05,51.975
  Bottom Layer w0.15: v1(66.5,50.5) 67.455,49.545 89.545,49.545 91.5,51.5 v1(93,51.5)
PD11/A3: P4.43 U5B.5 | length 91.3
  Top Layer w0.15: v1(64.5,49.5) 60.25,53.75 60.25,77 62.25,79 72,79 76.5,83.5 76.5,86 78.076,87.576 81.226,87.576 P4.43@82.55,88.9 ; v1(92.5,50) 93.825,51.325 U5B.5@95.05,51.325
  Bottom Layer w0.15: v1(64.5,49.5) 66.969,47.031 89.531,47.031 v1(92.5,50)
PD12: P4.44 P13.2 | length 23.2
  Top Layer w0.15: P13.2@69.29,103.75 69.29,99.46 72,96.75 72,90.25 v1(73.35,88.9)
  Bottom Layer w0.15: v1(73.35,88.9) P4.44@80.01,88.9
PD13: P4.45 P13.1 | length 21.4
  Top Layer w0.15: P13.1@71.83,103.75 73.25,102.33 v1(73.25,92.75)
  Bottom Layer w0.15: v1(73.25,92.75) 81.24,92.75 P4.45@82.55,91.44
PD14: P4.46 P13.4 | length 24.5
  Top Layer w0.15: P13.4@64.21,103.75 64.21,97.54 v1(70.25,91.5)
  Bottom Layer w0.15: v1(70.25,91.5) 70.28,91.47 79.98,91.47 P4.46@80.01,91.44
PD15: P4.47 P13.3 | length 25.2
  Top Layer w0.15: P13.3@66.75,103.75 66.75,97.5 v1(71,93.25)
  Bottom Layer w0.15: v1(71,93.25) 73,95.25 81.28,95.25 P4.47@82.55,93.98
PE0/CS_B: P5.17 P10.1 | length 34.9
  Top Layer w0.15: v1(19.75,71) 21.453,69.297 21.453,62.135 23.888,59.7 29.944,59.7 30.5,59.144 30.5,57.13 P5.17@31.75,55.88
  Bottom Layer w0.15: P10.1@12.62,77.15 16.35,77.15 19.75,73.75 v1(19.75,71)
PE2/RST: MIKROBUS1B.2 P5.15 P14B.2 | length 124.2
  Top Layer w0.15: P5.15@31.75,53.34 34.84,53.34 40.5,59 40.5,73 50.055,82.555 72.555,82.555 75.5,85.5 75.5,95.5 78.5,98.5 89.5,98.5 v1(90,98) ; v1(91.065,95.113) 120.333,95.113 P14B.2@120.57,95.35
  Bottom Layer w0.15: v1(90,98) 90,96.179 v1(91.065,95.113)
PE4/RST: MIKROBUS1A.2 P5.13 P14A.2 | length 171
  Bottom Layer w0.15: P5.13@31.75,50.8 48.3,50.8 66.25,68.75 66.25,90 76.25,100 92.5,100 95.5,97 109,97 118,106 148.221,106 158.871,95.35 P14A.2@160.57,95.35
PE5/CS: MIKROBUS1A.3 P5.14 P14A.3 | length 174.8
  Bottom Layer w0.15: P5.14@29.21,50.8 30.465,49.545 49.295,49.545 68.75,69 68.75,86 72.916,90.166 85.166,90.166 87.75,92.75 87.75,97.5 89.25,99 91,99 93.75,96.25 110.535,96.25 119.103,104.819 147.586,104.819 159.595,92.81 P14A.3@160.57,92.81
PE7/INT: MIKROBUS1B.15 P4.25 P15B.2 | length 92.1
  Top Layer w0.15: P4.25@82.55,66.04 85.765,66.04 86.305,65.5 112,65.5 132.894,86.394 132.894,95.144 138.303,100.553 145.676,100.553 147.003,99.226 147.003,95.755 146.611,95.363 MIKROBUS1B.15@144.86,95.363 ; P15B.2@143.43,95.35 143.473,95.393 MIKROBUS1B.15@144.783,95.393
  Bottom Layer w0.15: P4.25@82.55,66.04 P4.25@82.59,66
PE8/D0: P4.26 U5A.1 | length 40.5
  Top Layer w0.15: v1(91.5,62) 91.5,62.743 92.05,63.293 94.207,63.293 95,62.5 95,58.5 91.587,55.087 91.587,46.461 94.123,43.925 U5A.1@95.05,43.925
  Bottom Layer w0.15: P4.26@80.01,66.04 81.263,64.787 89.713,64.787 91.5,63 v1(91.5,62)
PE9/D1: P4.27 U5A.3 | length 40.1
  Top Layer w0.15: v1(94,61.5) 94,58.5 90.835,55.335 90.835,44.766 92.975,42.625 U5A.3@95.05,42.625
  Bottom Layer w0.15: P4.27@82.55,68.58 91.285,68.58 94,65.865 v1(94,61.5)
PE10/D2: P4.28 U5A.4 | length 42.6
  Top Layer w0.15: v1(93,62.5) 93,58.5 90,55.5 90,44 92,42 95.025,42 U5A.4@95.05,41.975
  Bottom Layer w0.15: P4.28@80.01,68.58 81.332,67.258 90.737,67.258 93,64.994 v1(93,62.5)
PE11/D3: P4.29 U5A.5 | length 43.5
  Top Layer w0.15: U5A.5@95.05,41.325 96.325,41.325 96.57,41.57 96.57,60.93 v1(96,61.5)
  Bottom Layer w0.15: P4.29@82.55,71.12 92.337,71.12 97,66.457 97,62.5 v1(96,61.5)
PE12/D4: P4.30 U5A.6 | length 45.9
  Top Layer w0.15: U5A.6@95.05,40.675 96.675,40.675 97.303,41.303 97.303,62.197 96.575,62.925 96.075,62.925 v1(96,63)
  Bottom Layer w0.15: P4.30@80.01,71.12 81.309,69.821 91.799,69.821 96,65.62 v1(96,63)
PE13/D5: P4.31 U5A.7 | length 52
  Top Layer w0.15: U5A.7@95.05,40.025 97.025,40.025 98,41 98,62 98.5,62.5 v1(100.5,62.5)
  Bottom Layer w0.15: P4.31@82.55,73.66 93.389,73.66 100.5,66.549 v1(100.5,62.5)
PE14/D6: P4.32 U5A.8 | length 51.9
  Top Layer w0.15: U5A.8@95.05,39.375 97.375,39.375 98.723,40.723 98.723,61.137 99,61.414 v1(99,61.5)
  Bottom Layer w0.15: P4.32@80.01,73.66 81.335,72.335 92.84,72.335 99,66.175 v1(99,61.5)
PE15/D7: P4.33 U5A.9 | length 56.8
  Top Layer w0.15: P4.33@82.55,76.2 v1(93.7,76.2) ; U5A.9@95.05,38.725 98.201,38.725 99.27,39.794 99.27,58.682 v1(102,61.412)
  Bottom Layer w0.15: v1(93.7,76.2) 102,67.9 v1(102,61.412)
PMOD-RX: P11.3 R6.1 | length 119.9
  Top Layer w0.15: R6.1@68.16,33.96 69.54,33.96 v1(70.5,33) ; v1(97.75,78.96) 97.75,83.418 104.082,89.75 105.02,89.75 P11.3@106.77,91.5 ; v1(117.75,53.75) 117.698,53.802 117.698,64.698 v1(119.25,66.25)
  Bottom Layer w0.15: v1(70.5,33) 71,32.5 90.25,32.5 92.5,34.75 105.75,34.75 117.75,46.75 v1(117.75,53.75) ; v1(97.75,78.96) 106.54,78.96 v1(119.25,66.25)
PMOD-TX: P11.2 R5.1 | length 125.6
  Top Layer w0.15: R5.1@68.16,35.865 68.295,36 v1(69.25,36) ; v1(100.5,79.96) 100.5,83.679 105.571,88.75 106.56,88.75 P11.2@109.31,91.5 ; v1(120.5,53.75) v1(120.5,67.25)
  Bottom Layer w0.15: v1(69.25,36) 68.5,35.25 68.5,32 69.25,31.25 91.5,31.25 93.75,33.5 107,33.5 120.5,47 v1(120.5,53.75) ; v1(100.5,79.96) 107.04,79.96 119.75,67.25 v1(120.5,67.25)
USB-UART-RX: R8.1 U1.9 | length 36.4
  Top Layer w0.15: U1.9@41.8,14.75 43.5,14.75 44.622,15.872 44.622,21.099 50.75,27.228 50.75,29.75 57.112,36.112 64.473,36.112 R8.1@64.72,35.865
USB-UART-TX: R10.1 U1.8 | length 35
  Top Layer w0.15: U1.8@41.8,14.25 44.25,14.25 45.25,15.25 45.25,17 54.25,26 59,26 59.598,26.598 59.598,31.485 62.073,33.96 R10.1@64.72,33.96
USB_D_N: P6.A7 P6.B7 U1.2 U2.2 U2.9 | length 32.7
  Top Layer w0.125: P6.B7@16.575,8.175 16.675,8.275 16.675,8.675 17.425,9.425 P6.A7@17.425,9.525 17.425,9.546 17.125,9.846 17.125,10.375 16.979,10.521 16.78,10.72 16.78,11.854 16.853,11.928 16.868,11.928 16.905,11.965 U2.2@16.905,12.148 16.905,12.33 16.868,12.368 16.853,12.368 16.78,12.441 16.78,12.689 16.853,12.763 16.868,12.763 16.905,12.8 U2.9@16.905,12.983 16.905,13.165 16.868,13.203 16.853,13.203 16.78,13.276 16.78,16.53 17.5,17.25 19.25,17.25 20.244,16.256 20.244,15.402 20.777,14.869 22.619,14.869 23.624,15.874 32.876,15.874 33.876,14.874 36.766,14.874 ; 36.839,14.874 36.962,14.75 U1.2@37.7,14.75
USB_D_P: P6.A6 P6.B6 U1.1 U2.1 U2.10 | length 33.2
  Top Layer w0.125: P6.A6@16.575,9.525 16.575,9.546 16.875,9.846 16.875,10.271 16.53,10.616 16.53,11.854 16.457,11.928 16.442,11.928 16.405,11.965 U2.1@16.405,12.148 16.405,12.33 16.442,12.368 16.457,12.368 16.53,12.441 16.53,12.689 16.457,12.763 16.442,12.763 16.405,12.8 U2.10@16.405,12.983 16.405,13.165 16.442,13.203 16.457,13.203 16.53,13.276 16.53,16.634 17.396,17.5 19.354,17.5 20.494,16.359 20.494,15.506 20.881,15.119 22.516,15.119 23.396,16 23.52,16.124 32.98,16.124 33.98,15.124 36.839,15.124 36.966,15.25 U1.1@37.7,15.25
  Bottom Layer w0.125: P6.A6@16.575,9.525 16.575,9.425 17.325,8.675 17.325,8.275 P6.B6@17.425,8.175